# Altium PCB MCU.PcbDoc (part 2 of 2)
Units mm, origin at the board's own origin, x right, y up, seen from the top; angles counter-clockwise.
Board outline 44.5 x 17 mm, 2 copper layers (Top Layer, Bottom Layer), stack 0.871 mm thick; 54 components, 45 nets, 248 pads, 179 vias.
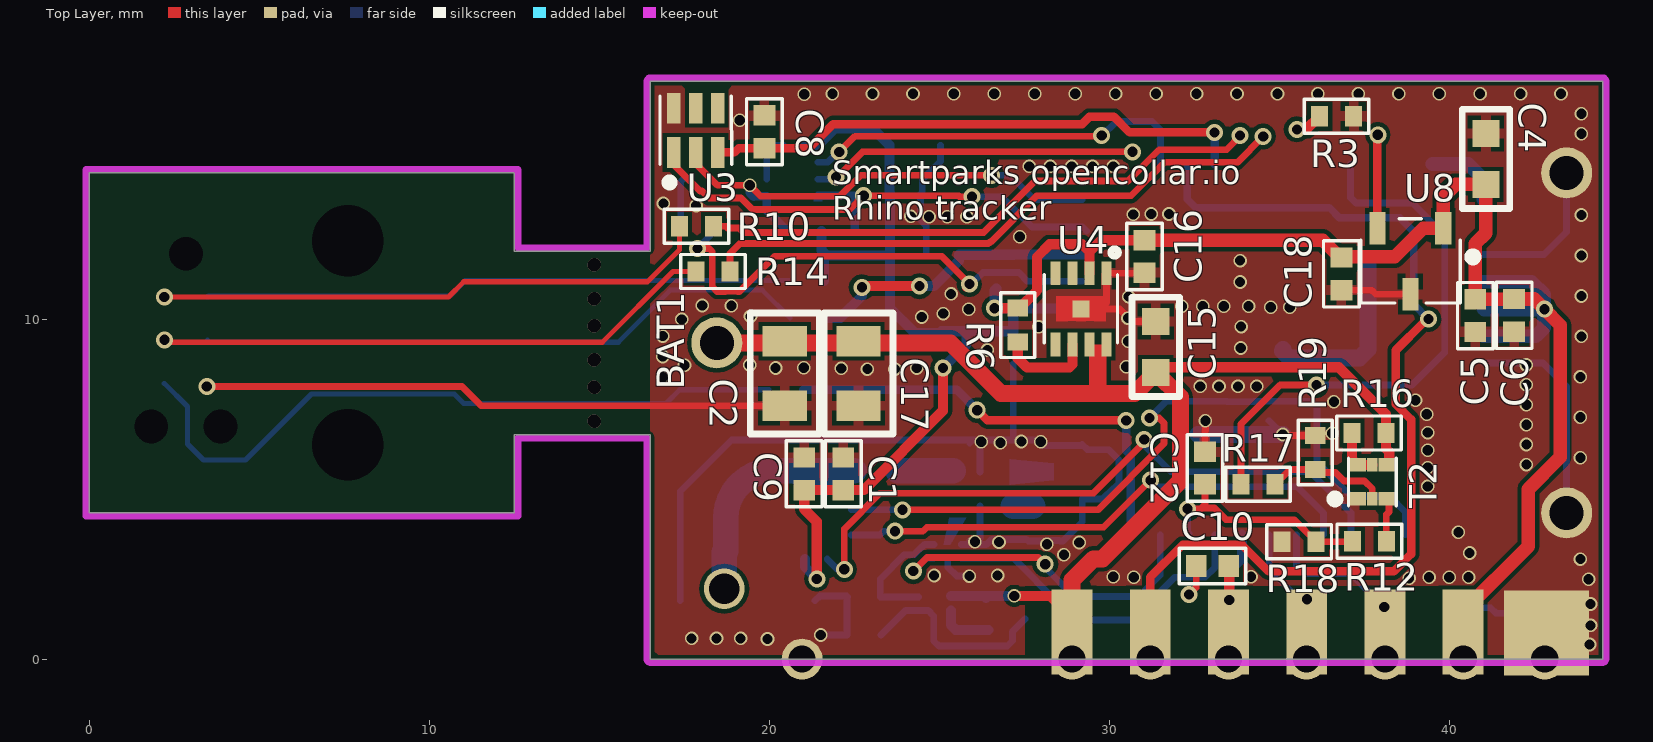
[diagram p0: Top Layer view]

## Via types
v1: diameter 0.4, hole 0.3, Top Layer to Bottom Layer, tented both sides, 136 vias
v2: diameter 0.5, hole 0.3, Top Layer to Bottom Layer, tented both sides, 37 vias
v3: diameter 0.4, hole 0.4, Top Layer to Bottom Layer, tented both sides, 6 vias

## Nets (pads, with @x,y where several pads share a name; then routed paths per layer and width w, separated by ;. In a path a pad name is that pad's centre, name@x,y a point inside that pad or via, vN(x,y) a via of type N, cw(c..) or ccw(c..) an arc to the next point about the centre after c; other vN are vias at no path point) (continued)
NetD1_2: D1.2 R5.2 | length 1.5
  Bottom Layer w0.2: R5.2 17.39,14.04 D1.2
NetR6_1: R6.1 U4.6 | length 2.8
  Top Layer w0.3: R6.1 27.3,8.85 27.57,8.58 28.82,8.58 28.91,8.67 U4.6
NetR7_1: R7.1 T1.5 T1.6 | length 1.6
  Bottom Layer w0.3: T1.5 T1.6 25.48,0.86 R7.1
NetR8_2: R8.2 R9.2 T1.2 | length 5.9
  Bottom Layer w0.2: R9.2 24,1.43 T1.2 24.67,1.43 24.83,1.27 24.83,0.54 24.987,0.383 26.993,0.383 27.15,0.54 27.15,0.81 R8.2
NetR12_2: R12.2 T2.3 | length 1.3
  Top Layer w0.2: R12.2 38.14,4.25 38.22,4.33 38.22,4.65 T2.3
NetR16_1: R16.1 T2.5 T2.6 | length 1.4
  Top Layer w0.3: R16.1 37.13,5.88 T2.6 T2.5
NetR17_2: R17.2 R19.2 T2.2 | length 3.6
  Top Layer w0.2: R17.2 35.31,5.58 R19.2 36.141,5.489 36.65,5.489 36.899,5.24 37.5,5.24 37.73,5.01 T2.2
NetR20_2: R20.2 U5.4 | length 0.6
  Bottom Layer w0.75: 27.17,4.5 R20.2@27.74,4.5
NetU2_1: U2.1 U2.48 | length 2.3
  Bottom Layer w0.4: U2.48 40.55,14.56 41,14.11 U2.1
NetU2_26: U2.26 U5.3
NetU5_6: U5.6 U6.B1
REED: U2.46 U8.2 | length 2.8
  Top Layer w0.25: U8.2 37.88,15.41 v2(37.89,15.42)
RESET: C3.2 R4.1 R13.1 U2.34 | length 8.6
  Top Layer w0.3: v2(22.72,10.934) 22.756,10.97 v2(24.41,10.97)
  Bottom Layer w0.3: R13.1 22.08,10.04 22.72,10.68 v2(22.72,10.934) ; v2(24.41,10.97) 24.83,10.97 25.57,11.71 C3.2 R4.1 27.17,11.89 27.18,11.9 U2.34
SCL: R1.1 U1.1 U2.35 U3.1 | length 16.1
  Top Layer w0.2: U3.1 17.18,14.54 17.953,13.767 18.017,13.767 18.224,13.56 19.16,13.56 19.5,13.22 22.36,13.22 v2(22.77,13.63) 25.56,13.63 25.58,13.61 25.59,13.6 v2(25.96,13.6)
  Bottom Layer w0.2: v2(25.96,13.6) 26.81,13.6 26.82,13.61 27.72,12.71 U2.35 U2.35@29.32,12.59
  Bottom Layer w0.254: U1.1 21.44,13.63 v2@22.7,13.63 ; R1.1 22.51,12.62 22.51,13.44 v2@22.7,13.63 ; v2(22.77,13.63) v2@22.7,13.63
SCLK: U2.16 U7.3 | length 19.5
  Top Layer w0.2: v2(22.2,2.64) 22.2,3.83 23.25,4.88 29.53,4.88 31.02,6.37 v2(31.02,6.46)
  Bottom Layer w0.2: U7.3 22.003,2.64 v2(22.2,2.64) ; v2(31.02,6.46) 31.02,6.3 31.81,5.51 35.89,5.51 37.098,4.302 U2.16
SDA: R2.1 U1.4 U2.36 U3.2 | length 14.8
  Top Layer w0.2: U3.2 17.83,14.579 18.476,13.933 v1(19.42,13.933) v1@19.503,13.85 ; v2(26.534,14.23) 22.685,14.23 22.065,13.61 19.743,13.61 19.587,13.767 ; v1@19.503,13.85 19.587,13.767 ; v1@19.503,13.85 19.587,13.767
  Bottom Layer w0.2: v2(26.534,14.23) 27.07,14.23 27.79,13.51 U2.36
  Bottom Layer w0.254: v1(19.42,13.933) 19.42,13.718 19.538,13.6 19.548,13.61 U1.4 19.92,13.2 R2.1
SDAT: U2.14 U7.12 | length 21.8
  Top Layer w0.2: v2(23.91,4.39) 29.66,4.39 31.607,6.337 31.607,6.943 31.46,7.09 v2(31.18,7.09)
  Bottom Layer w0.2: U7.12@22.404,4.39 v2(23.91,4.39) ; v2(31.18,7.09) 31.17,7.09 31.662,7.582 33.442,7.582 33.454,7.57 34.242,7.57 34.254,7.582 35.942,7.582 36.1,7.424 36.1,5.79 37.11,4.78 38.25,4.78 38.698,4.332 U2.14
SEN: U2.17 U7.1 | length 15.7
  Top Layer w0.2: v2(23.689,3.76) 24.51,3.76 24.627,3.877 29.827,3.877 v2(31.21,5.26)
  Bottom Layer w0.2: U7.1 23.243,3.653 23.35,3.76 v2(23.689,3.76) ; v2@31.21,5.15 v2(31.21,5.26) 31.265,5.205 31.4,5.07 35.52,5.07 36.298,4.292 U2.17
SWCLK: R14.2 U2.42 | length 17.4
  Top Layer w0.2: R14.2@18.84,11.6 18.84,11.927 19.136,12.223 26.435,12.223 26.482,12.27 26.51,12.27 27.87,13.63 30.64,13.63 31.62,14.61 33.76,14.61 v2(34.52,15.37)
SWDIO: R10.2 U2.41 | length 16.8
  Top Layer w0.2: R10.2 18.716,12.73 18.763,12.683 19.097,12.683 19.23,12.55 26.3,12.55 27.81,14.06 30.54,14.06 31.46,14.98 33.44,14.98 33.84,15.38 v2(33.84,15.4)
UART2_TX: R15.2 U2.24 | length 13.3
  Top Layer w0.25: v2(26.11,7.32) 26.41,7.02 v2(30.49,7.02)
  Bottom Layer w0.25: R15.2 25.51,7.92 v2(26.11,7.32) ; v2(30.49,7.02) 30.49,6.133 30.627,5.996 30.627,4.05 30.65,4.027 U2.24
VBAT: BAT1.2 C1.2 C2.2 C15.2 pad.2 pad.13@28.894,0 R7.2 R16.2 T1.4 T2.4 U4.7 U4.8 | length 35.8
  Top Layer w0.3: v1(27.2,1.86) 28.26,1.86 28.9,1.22 pad.2@28.9,1 ; C15.2 31.516,8.586 36.744,8.586 38.13,7.2 R16.2 38.13,6.18 38.23,6.08 38.23,5.78 T2.4
  Top Layer w0.5: BAT1.2 25.32,9.3 26.81,7.81 30.74,7.81 C15.2 32.084,7.706 32.084,5.244 29.79,2.95 29.53,2.95 28.9,2.32 pad.2@28.9,1.22
  Bottom Layer w0.3: T1.4 26.31,1.86 26.37,1.8 R7.2@26.37,1.857 ; R7.2 v1(27.2,1.86) v1@27.24,1.86
VBKP: C10.2 pad.4 pad.13@33.497,0 U2.20 | length 3.1
  Top Layer w0.3: C10.2 33.52,2.73 v1(33.52,1.74)
  Bottom Layer w0.3: v1(33.52,1.74) 33.52,2.579 33.898,2.957 U2.20
VSWR_AN: U2.23 U6.A2 | length 10.2
  Top Layer w0.2: v2(24.23,2.59) 24.63,2.99 27.91,2.99 v2(28.11,2.79)
  Bottom Layer w0.2: v2(24.23,2.59) 24.61,2.97 U6.A2 ; v2(28.11,2.79) 28.11,2.69 28.96,1.84 30.86,1.84 31.49,2.47 U2.23 U2.23
VSWR_EN: R8.1 U2.21 U6.C2 | length 10.1
  Bottom Layer w0.2: U6.C2 25.69,2.97 27.17,2.97 28.52,1.62 R8.1 28.55,1.15 30.66,1.15 31.92,2.41 32.81,2.41 33.098,2.698 U2.21
pads on no net: CON1.0 U1.2 U1.3 U2.2 U2.8 U2.9 U2.10 U2.11 U2.12 U2.13 U2.15 U2.28 U2.29 U2.30 U2.31 U2.47 U3.4 U3.5 U4.3 U4.4 U4.5
copper on no net:
  other v3: 14.85,7 14.85,8 14.85,8.8 14.85,9.8 14.85,10.6 14.85,11.6

## Polygon pours and split planes (outlines as drawn)
GND on Top Layer "Top Layer-GND" (solid, remove dead copper, pour order 6): 16.5,17 44.5,17 44.5,0 16.5,0 16.5,4 16.5,5.6
GND on Bottom Layer "Bottom Layer-GND" (solid, remove dead copper, pour order 8): 16.233,16.929 16.233,5.529 16.233,3.929 16.233,-0.071 44.233,-0.071 44.233,16.929

## Keep-outs
Keep-Out Layer:
  lines w0.2: 16.4,0 ccw(c16.5,0) 16.5,-0.1 ; 16.4,0 ccw(c16.5,0) 16.5,-0.1 ; 16.4,0 16.4,3.9 16.4,4.1 16.4,5.5 16.4,5.7 16.4,6.5 12.6,6.5 12.6,4.2 -0.1,4.2 -0.1,14.4 12.6,14.4 12.6,12.1 16.4,12.1 16.4,12.7 16.4,17 ; 16.4,17 cw(c16.5,17) 16.5,17.1 ; 16.4,17 cw(c16.5,17) 16.5,17.1 ; 16.5,-0.1 44.5,-0.1 ; 16.5,17.1 44.5,17.1 ; 44.5,-0.1 ccw(c44.5,0) 44.6,0 ; 44.5,-0.1 ccw(c44.5,0) 44.6,0 ; 44.5,17.1 cw(c44.5,17) 44.6,17 ; 44.5,17.1 cw(c44.5,17) 44.6,17 ; 44.6,0 44.6,17

## Other copper
Top Layer:
  region net VBAT: 29.41,9.25 29.91,9.25 29.91,7.78 29.41,7.78
  pour cut-out: 41,2.15 27.5,2.15 27.5,0 40.999,0
Bottom Layer:
  region net NetU2_26: 27.07,5.88 27.09,5.88 28.348,5.756 28.367,5.756 28.367,5.256 28.348,5.256 27.09,5.13 27.07,5.131
  region net ANT: 21.425,4.95 21.315,4.95 21.105,4.74 20.64,5.205 20.64,5.265 22.1,5.265 22.13,5.235 21.635,4.74
  pour cut-out: 23.52,6.052 23.52,5.028 22.53,5.028 22.49,4.988 22.49,6.052
  pour cut-out: 25.11,6.052 27.072,6.052 27.053,4 25.11,4 25.11,5.5
  region net NetU5_6: 25.29,4.15 25.12,3.37 25.309,3.37 25.79,4.15

## Silkscreen, mask and mechanical layers (free items; w line width, h text height)
Top Overlay:
  circle w0.2: c30.15,11.959 r0.11
  text "Smartparks opencollar.io / Rhino tracker" at 21.85,12.92 h0.7
Top Solder:
  rectangle: 20.34,0 26.84,2.162
  rectangle: 41.56,-0.2 44.5,2.1
  region: 25.6,0
Route Tool Path:
  lines w1: 0,3.8 12.2,3.8 ; 0,14.8 12.3,14.8 ; 13,14.3 13,12.5 16,12.5 ; 15.9,6 15.9,5.8 ; 15.9,12.5 15.9,12.7 ; 16,0 16,5.93 ; 16,12.7 16,17 ; 16,5.6 16,6.1 13,6.1 13,4.4 ; 16.5,17.5 18.9,17.5 ; 22.4,17.5 36.2,17.5 ; 22.43,-0.5 16.6,-0.5 ; 26.1,-0.5 44.5,-0.5 ; 39.6,17.5 44.5,17.5 ; 13,4.4 cw(c12.4,4.4) 12.4,3.8 ccw(c12.4,4.4) 13,4.4 ; 15.9,5.8 15.9,5.8 ; 15.9,12.7 15.9,12.7 ; 15.9,12.7 15.9,12.7 ; 16.6,-0.5 cw(c16.6,0.1) 16,0.1 ccw(c16.6,0.1) 16.6,-0.5 ; -0.5,4.4 ccw(c0.1,4.4) 0.1,3.8 cw(c0.1,4.4) -0.5,4.4 ; -0.5,14.2 cw(c0.1,14.2) 0.1,14.8 ccw(c0.1,14.2) -0.5,14.2 ; 12.4,14.8 cw(c12.4,14.2) 13,14.2 ccw(c12.4,14.2) 12.4,14.8 ; 16,16.9 cw(c16.6,16.9) 16.6,17.5 ccw(c16.6,16.9) 16,16.9 ; 44.4,-0.5 ccw(c44.4,0.1) 45,0.1 cw(c44.4,0.1) 44.4,-0.5 ; 44.4,17.5 cw(c44.4,16.9) 45,16.9 ccw(c44.4,16.9) 44.4,17.5

## Dimensions
16.5,0 to 16.5,17 on Mechanical 16
16.5,17 to 12.5,14.3 on Mechanical 16
12.5,12 to 12.5,14.3 on Mechanical 16
44.5,17 to 16.5,17 on Mechanical 16

## Text inside footprints (layer, text, board x,y; h text height)
BAT1: Bottom Assembly (Mech30) "-" at 41.2,8.3 h2 r270; Bottom Assembly (Mech30) "+" at 21.6,8.2 h2; Bottom Overlay "-" at 41.2,8.3 h2 r270; Bottom Overlay "+" at 15.43,8.26 h2 r270
CON1: Bottom Overlay "ICSP" at 4.89,6.65 h1.52 r270